# Allegro board MB1256A.brd
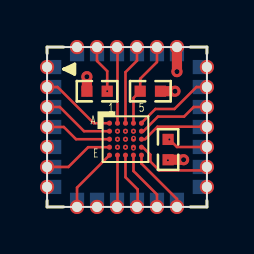
[diagram p0: board, top side]
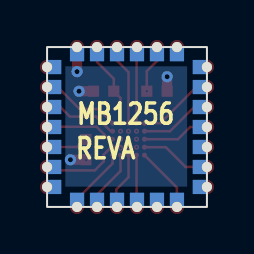
[diagram p1: board, bottom side, seen from below]

Outline 8 x 8 mm; copper layers: TOP, L2_IN1, L3_IN2, BOTTOM. Coordinates in mm from the lower left corner of the outline.
Outline path: rectangle 0,0 8,8

## Placement (name value [footprint] x y rotation side)
C1  100nF  [0402C]  6.06 2.87 270 top
C2  100nF  [0402C]  2.5 5.79 180 top
C3  100nF  [0402C]  5.17 5.79 0 top
M1  WLCSP module board  [WLCSP25_0R4_2R05X2R05_MOUDLE]  4 4 270 top
NOREF  -  []  376.61 -145.78 0 top
NOREF#2  -  []  78.82 90.09 0 top
NOREF#3  -  []  0 0 90 top
NOREF#4  -  []  0 8 0 top
NOREF#5  -  []  195.12 67.78 0 top
NOREF#6  -  []  -11.93 -55.79 0 top
U1  IP4856CX25_C  [WLCSP25_0R4_2R05X2R05]  3.92 3.39 0 top

## Library data of the parts
C1-C3 = 0402C
M1 = WLCSP25_0R4_2R05X2R05_MOUDLE
U1 = WLCSP25_0R4_2R05X2R05

## Footprints (pads in the part's own frame, mm; a bottom-side part is the same pattern mirrored in y, then rotated)
0402C
  rect 0.559x0.559 smd: 1(-0.508,0) 2(0.508,0)
WLCSP25_0R4_2R05X2R05
  round 0.254 smd: A1(-0.8,0.8) A2(-0.4,0.8) A3(0,0.8) A4(0.4,0.8) A5(0.8,0.8) B1(-0.8,0.4) B2(-0.4,0.4) B3(0,0.4) B4(0.4,0.4) B5(0.8,0.4) C1(-0.8,0) C2(-0.4,0) C3(0,0) C4(0.4,0) C5(0.8,0) D1(-0.8,-0.4) D2(-0.4,-0.4) D3(0,-0.4) D4(0.4,-0.4) D5(0.8,-0.4) E1(-0.8,-0.8) E2(-0.4,-0.8) E3(0,-0.8) E4(0.4,-0.8) E5(0.8,-0.8)
WLCSP25_0R4_2R05X2R05_MOUDLE
  round 0.711 hole 0.508: (-4,-2.5) 1(-3,-4) 2(-2,-4) 3(-1,-4) 4(0,-4) 5(1,-4) 6(2,-4) 7(3,-4) 8(4,-2.5) 9(4,-1.5) 10(4,-0.5) 11(4,0.5) 12(4,1.5) 13(4,2.5) 14(3,4) 15(2,4) 16(1,4) 17(0,4) 18(-1,4) 19(-2,4) 20(-3,4) 21(-4,2.5) 22(-4,1.5) 23(-4,0.5) 24(-4,-0.5) 25(-4,-1.5)

## Nets
NETC1_1: C1.1 M1.16 U1.C4
NETC1_2: C1.2 C2.2 C3.2 M1.21 U1.C3
NETC2_1: C2.1 M1.25 U1.B3
NETC3_1: C3.1 M1.22 U1.A4
NETM1_1: M1.1 U1.B2
NETM1_2: M1.2 U1.A1
NETM1_3: M1.3 U1.B1
NETM1_4: M1.4 U1.C1
NETM1_5: M1.5 U1.C2
NETM1_6: M1.6 U1.D1
NETM1_7: M1.7 U1.D2
NETM1_8: M1.8 U1.E1
NETM1_9: M1.9 U1.D3
NETM1_10: M1.10 U1.E2
NETM1_11: M1.11 U1.E3
NETM1_12: M1.12 U1.E4
NETM1_13: M1.13 U1.E5
NETM1_14: M1.14 U1.D4
NETM1_15: M1.15 U1.D5
NETM1_17: M1.17 U1.C5
NETM1_18: M1.18 U1.B5
NETM1_19: M1.19 U1.A5
NETM1_20: M1.20 U1.B4
NETM1_23: M1.23 U1.A3
NETM1_24: M1.24 U1.A2

## Via types
v1: diameter 0.229, hole 0.102, TOP to L2_IN1, 12 vias
v2: diameter 0.559, hole 0.254, TOP to BOTTOM, 4 vias

## Routing (per net, layer and track width the routed paths; a pad name or vN(x,y) marks a point on that pad's centre or on a via; arc(x,y) is an arc through that point)
NETC1_1: length 4
  TOP w0.076: U1.C4 4.33,3.4
  TOP w0.127: 4.33,3.4 v1(4.33,3.45) ; M1.16 6.5,3 v1(6.12,3.38) C1.1
  L2_IN1 w0.127: v1(4.33,3.45) 6.05,3.45 v1(6.12,3.38)
NETC1_2: length 6
  TOP w0.508: C2.2 v2(1.99,6.52) ; C1.2 v2(6.83,2.36) ; v2(6.5,6.77) M1.21 ; C3.2 v2(6.4,5.79)
  L2_IN1 w0.089: 4.47,3.19 4.18,3.19
  L2_IN1 w0.102: v1(3.92,3.39) 4.12,3.19 4.18,3.19 ; 4.64,3.09 4.54,3.19 4.47,3.19
  L2_IN1 w0.127: 4.64,3.09 5.4,2.34 v1(6.05,2.34)
NETC2_1: length 4.8
  TOP w0.127: v1(3.01,5.79) 3.01,6.8 2.5,7.3 M1.25
  L2_IN1 w0.127: v1(3.01,5.79) 3.05,5.79 3.92,4.91 v1(3.92,3.79)
NETC3_1: length 4.3
  TOP w0.127: M1.22 5.5,7.25 4.66,6.41 C3.1 4.32,5.45 U1.A4
NETM1_1: length 4.9
  L2_IN1 w0.127: v1(3.52,3.79) 3.32,3.79 0.11,7 M1.1
NETM1_2: length 3.9
  TOP w0.127: M1.2 0.53,6 2.34,4.19 U1.A1
NETM1_3: length 3.6
  TOP w0.127: M1.3 0.64,5 1.85,3.79 U1.B1
NETM1_4: length 3.4
  TOP w0.127: U1.C1 1.45,3.39 0.84,4 M1.4
NETM1_5: length 3.7
  L2_IN1 w0.127: M1.5 1.48,3 1.87,3.39 v1(3.52,3.39)
NETM1_6: length 3.5
  TOP w0.127: M1.6 1.07,2 2.06,2.99 U1.D1
NETM1_7: length 4.3
  L2_IN1 w0.127: v1(3.52,2.99) 1.53,1 M1.7
NETM1_8: length 3.3
  TOP w0.127: U1.E1 1.5,0.97 M1.8
NETM1_9: length 3.6
  L2_IN1 w0.127: v1(3.92,2.99) 3.92,2.23 2.5,0.81 M1.9
NETM1_10: length 2.6
  TOP w0.127: M1.10 3.52,0.02 U1.E2
NETM1_11: length 2.9
  TOP w0.127: U1.E3 3.92,1.49 4.53,0.88 4.53,0.03 M1.11
NETM1_12: length 3.1
  TOP w0.127: U1.E4 4.32,1.8 5.5,0.62 M1.12
NETM1_13: length 3.3
  TOP w0.127: M1.13 6.5,0.39 4.72,2.17 U1.E5
NETM1_14: length 4.9
  TOP w0.076: v1(4.32,2.93) U1.D4
  L2_IN1 w0.127: v1(4.32,2.93) 4.32,2.38 5.28,1.42 7.58,1.42 M1.14
NETM1_15: length 4
  TOP w0.127: M1.15 7.83,1.83 5.61,1.83 5.17,2.27 5.17,2.62 4.79,2.99 U1.D5
NETM1_17: length 3.5
  TOP w0.127: U1.C5 4.9,3.39 5.52,4.01 7.99,4.01 M1.17
NETM1_18: length 3.8
  TOP w0.127: U1.B5 4.82,3.79 5.55,4.52 6.86,4.52 7.34,5 M1.18
NETM1_19: length 4
  TOP w0.127: M1.19 7.47,6 6.37,4.9 5.42,4.9 4.72,4.2 U1.A5
NETM1_20: length 5.4
  L2_IN1 w0.127: M1.20 7.58,7 6.89,6.3 6.12,6.3 4.6,4.78 4.6,4.04 4.35,3.79 v1(4.32,3.79)
NETM1_23: length 4
  TOP w0.127: M1.23 4.5,7.32 3.92,6.74 U1.A3
NETM1_24: length 3.8
  TOP w0.127: M1.24 3.52,7.98 U1.A2

## Copper pours and planes (outline as drawn; the poured copper is in the pictures)
NETC1_2 on BOTTOM: 0.99,7.04 0.99,1.02 7.09,1.02 7.09,7.04
NETC1_2 on L3_IN2: 0.64,7.44 0.64,0.64 7.37,0.64 7.37,7.44

## Text on the board
Ref Des/Silkscreen Bottom: MB1256 | REVA
User.35: FIGURE | SIZE | 4.0 | TOLERANCE | +3.0/-3.0 | DRILL CHART: TOP to L2_IN1 | ALL UNITS ARE IN MILS | PLATED | ROTATION | - | QTY | 12 | TOTAL HOLES:
User.44: FIGURE | SIZE | 10.0 | 20.0 | TOLERANCE | +3.0/-3.0 | DRILL CHART: TOP to BOTTOM | ALL UNITS ARE IN MILS | PLATED | ROTATION | - | QTY | 4 | 26 | 30 | TOTAL HOLES:
